# EAGLE board gate (EAGLE 6.1)
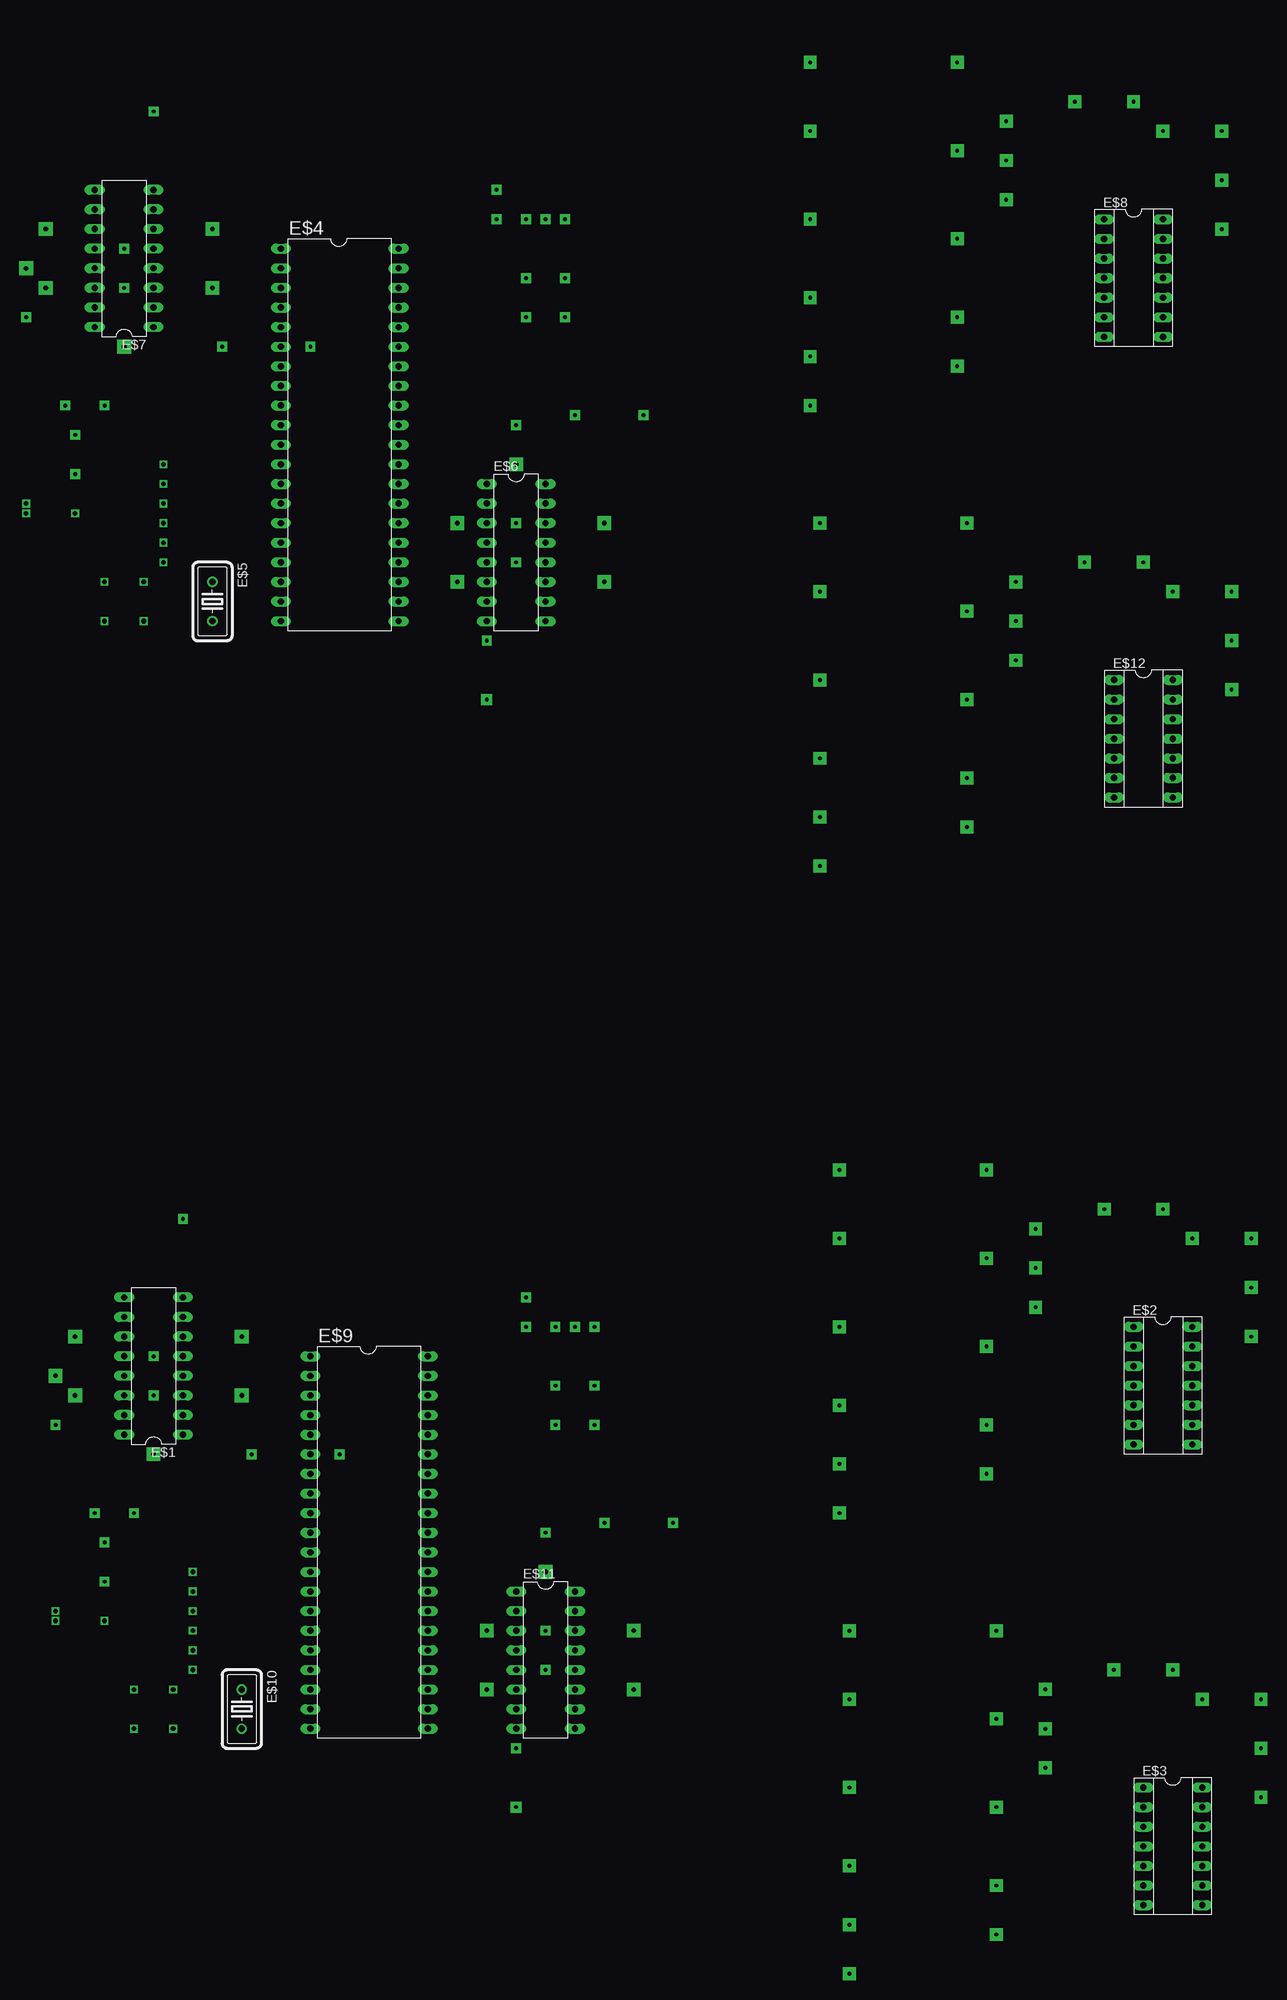
[diagram p0: board, top side]
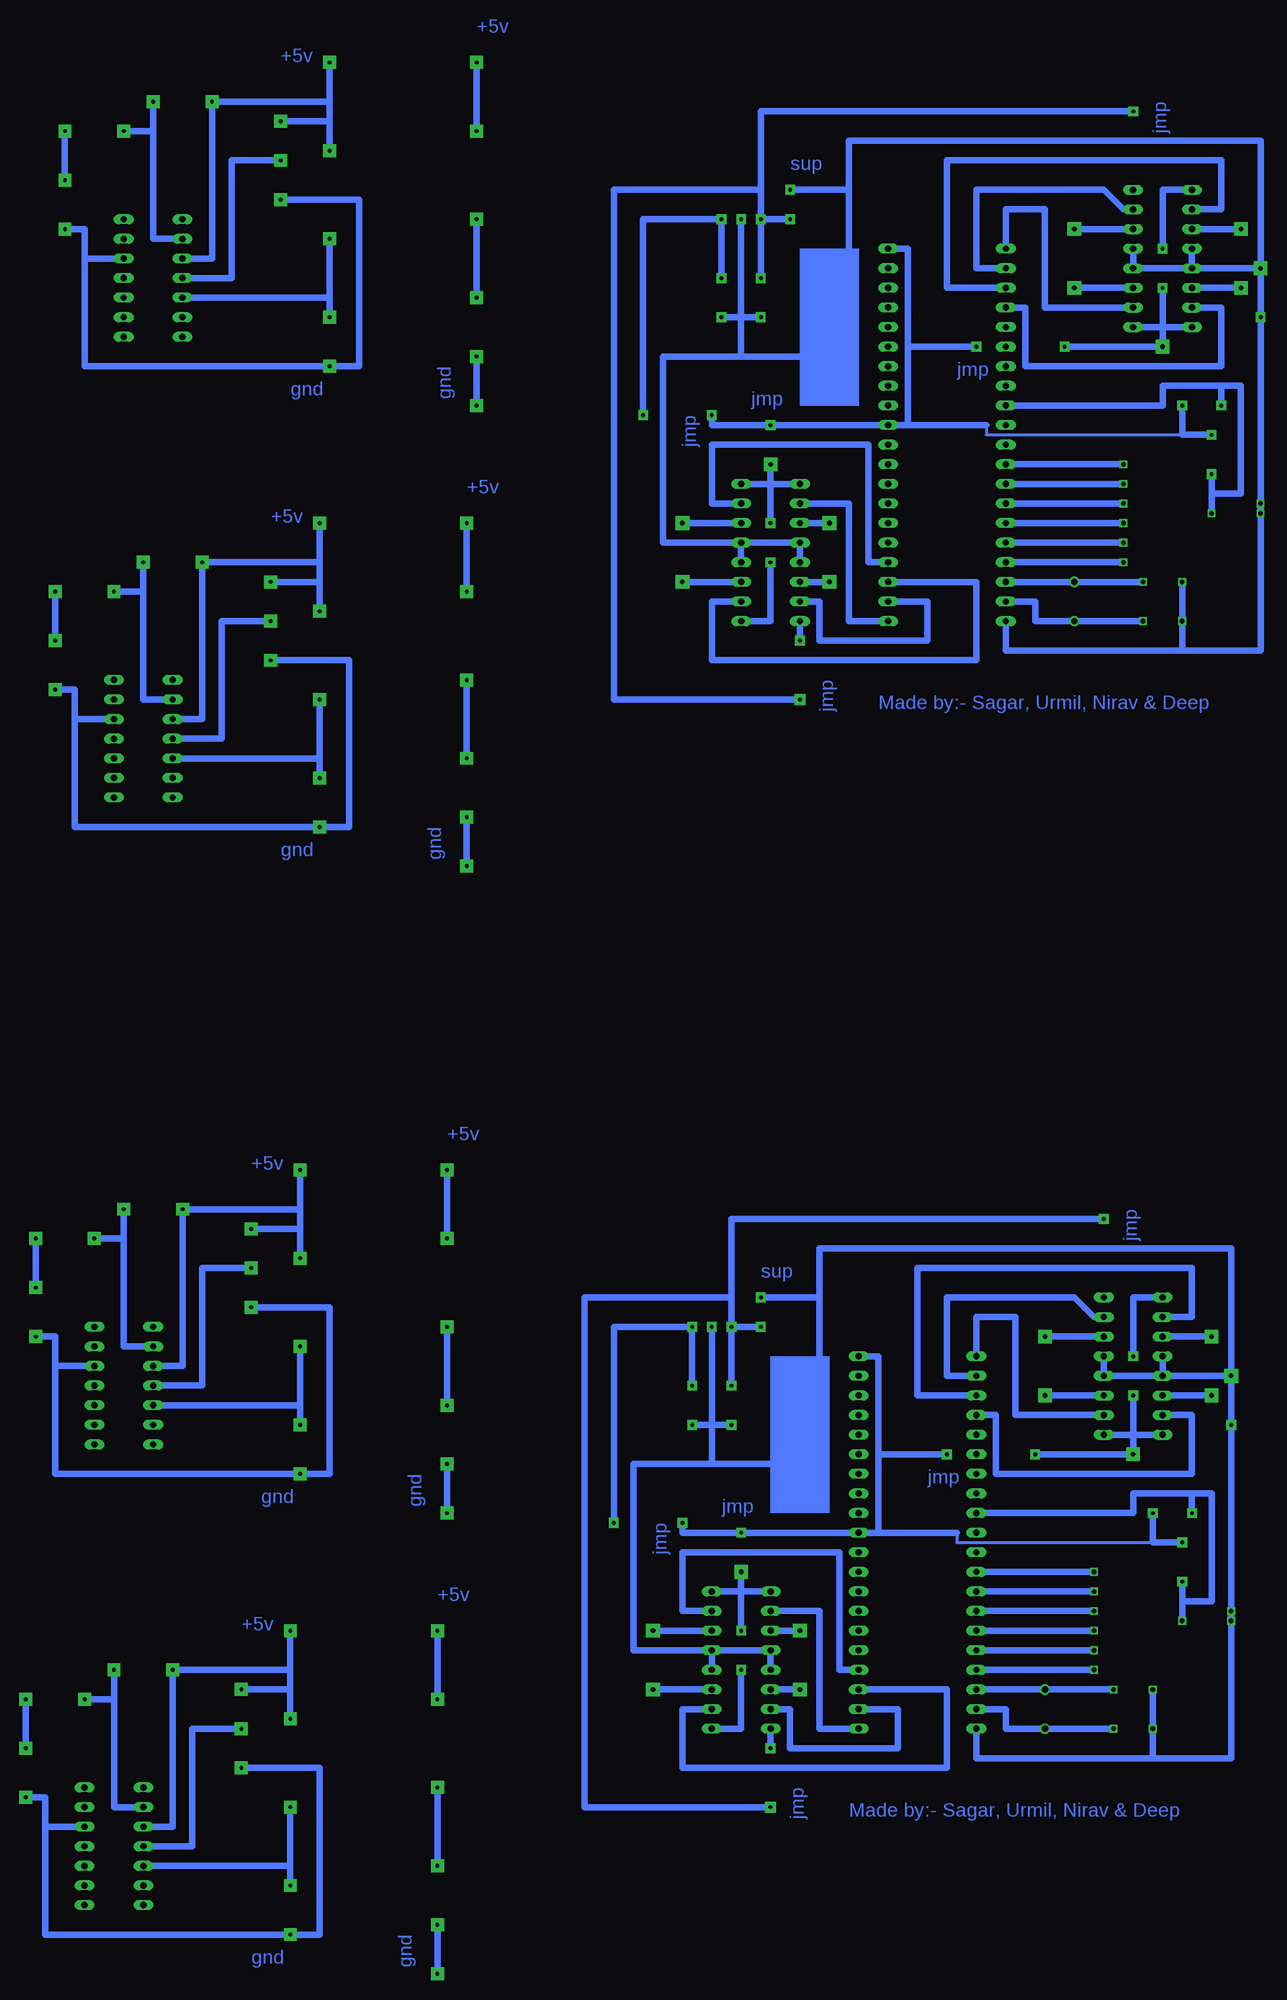
[diagram p1: board, bottom side, seen from below]

No outline drawn. Coordinates in mm, seen from the top.
Copper layers (1*16): Top 0.035mm / dielectric 1.5mm / Bottom 0.035mm
Design rules: minimum track width 10mil, minimum drill 24mil, track to track 8mil, track to pad 8mil, pad to pad 8mil, via to via 8mil, smd to smd 8mil, copper to edge 40mil, drill to drill 8mil, minimum pad ring 10mil, minimum via ring 8mil, stop-mask expansion 4mil, vias tented up to drill 0mil, thermal gap 10mil

## Footprints (pad centres in the part's own frame; a part is rotated, then mirrored left to right if it is on the bottom)
DIL16 = drill 0.813 long: 1 -8.89,-3.81; 2 -6.35,-3.81; 3 -3.81,-3.81; 4 -1.27,-3.81; 5 1.27,-3.81; 6 3.81,-3.81; 7 6.35,-3.81; 8 8.89,-3.81; 9 8.89,3.81; 10 6.35,3.81; 11 3.81,3.81; 12 1.27,3.81; 13 -1.27,3.81; 14 -3.81,3.81; 15 -6.35,3.81; 16 -8.89,3.81
SOCKET-14 = drill 0.813 long: 1 -7.62,-3.81; 2 -5.08,-3.81; 3 -2.54,-3.81; 4 0,-3.81; 5 2.54,-3.81; 6 5.08,-3.81; 7 7.62,-3.81; 8 7.62,3.81; 9 5.08,3.81; 10 2.54,3.81; 11 0,3.81; 12 -2.54,3.81; 13 -5.08,3.81; 14 -7.62,3.81
DIL40 = drill 0.813 long: 1 -24.13,-7.62; 2 -21.59,-7.62; 3 -19.05,-7.62; 4 -16.51,-7.62; 5 -13.97,-7.62; 6 -11.43,-7.62; 7 -8.89,-7.62; 8 -6.35,-7.62; 9 -3.81,-7.62; 10 -1.27,-7.62; 11 1.27,-7.62; 12 3.81,-7.62; 13 6.35,-7.62; 14 8.89,-7.62; 15 11.43,-7.62; 16 13.97,-7.62; 17 16.51,-7.62; 18 19.05,-7.62; 19 21.59,-7.62; 20 24.13,-7.62; 21 24.13,7.62; 22 21.59,7.62; 23 19.05,7.62; 24 16.51,7.62; 25 13.97,7.62; 26 11.43,7.62; 27 8.89,7.62; 28 6.35,7.62; 29 3.81,7.62; 30 1.27,7.62; 31 -1.27,7.62; 32 -3.81,7.62; 33 -6.35,7.62; 34 -8.89,7.62; 35 -11.43,7.62; 36 -13.97,7.62; 37 -16.51,7.62; 38 -19.05,7.62; 39 -21.59,7.62; 40 -24.13,7.62
HC18U-V = drill 0.813: 1 -2.54,0; 2 2.54,0

## Placement (x,y rotation side)
E$1  [DIL16]  -17.78,90.17 90 top
E$2  [SOCKET-14]  113.03,87.63 270 top
E$3  [SOCKET-14]  114.3,27.94 270 top
E$4  [DIL40]  6.35,210.82 270 top
E$5  [HC18U-V]  -10.16,189.23 270 top
E$6  [DIL16]  29.21,195.58 270 top
E$7  [DIL16]  -21.59,233.68 90 top
E$8  [SOCKET-14]  109.22,231.14 270 top
E$9  [DIL40]  10.16,67.31 270 top
E$10  [HC18U-V]  -6.35,45.72 270 top
E$11  [DIL16]  33.02,52.07 270 top
E$12  [SOCKET-14]  110.49,171.45 270 top

## Library data of the parts
E$1 E$4 E$6 E$7 E$9 E$11 = 40xx
E$2 E$3 E$8 E$12 = ic-package
E$5 E$10 = crystal

## Nets
S$1: E$9.18 E$10.1
S$2: E$11.8
S$3: E$1.3
S$5: E$9.31 E$9.40
S$6: E$1.6
S$7: E$11.4 E$11.5 E$11.12 E$11.13
S$8: E$9.19 E$10.2
S$11: E$1.14
S$12: E$9.17
S$13: E$9.16
S$14: E$9.15
S$15: E$9.14
S$16: E$9.13
S$17: E$9.12
S$18: E$9.9
S$21: E$1.11
S$22: E$1.7 E$9.2
S$24: E$1.2 E$9.1
S$25: E$1.10 E$9.3
S$26: E$1.1 E$1.16
S$27: E$1.15 E$9.4
S$29: E$1.9
S$30: E$1.4 E$1.5 E$1.12 E$1.13 E$9.20
S$34: E$2.5
S$35: E$2.4
S$37: E$2.12
S$38: E$2.2
S$41: E$2.3
S$46: E$3.5
S$48: E$3.4
S$49: E$3.12
S$50: E$3.2
S$52: E$3.3
S$53: E$6.3
S$54: E$6.6
S$55: E$11.3
S$56: E$6.14
S$57: E$6.11
S$58: E$4.22 E$6.7
S$59: E$4.21 E$6.2
S$60: E$11.6
S$61: E$4.23 E$6.10
S$62: E$6.1 E$6.16
S$63: E$11.14
S$64: E$4.24 E$6.15
S$65: E$11.11
S$66: E$9.22 E$11.7
S$67: E$9.21 E$11.2
S$68: E$9.23 E$11.10
S$69: E$6.9
S$70: E$11.1 E$11.16
S$71: E$9.24 E$11.15
S$72: E$4.31 E$4.40
S$73: E$11.9
S$74: E$4.9
S$75: E$4.19 E$5.2
S$76: E$4.17
S$77: E$4.16
S$78: E$4.15
S$79: E$4.14
S$80: E$4.13
S$81: E$4.12
S$82: E$4.18 E$5.1
S$85: E$7.3
S$86: E$7.6
S$87: E$7.14
S$88: E$7.11
S$89: E$4.2 E$7.7
S$90: E$4.1 E$7.2
S$91: E$4.3 E$7.10
S$92: E$7.1 E$7.16
S$93: E$4.4 E$7.15
S$94: E$7.9
S$95: E$4.20 E$7.4 E$7.5 E$7.12 E$7.13
S$96: E$6.4 E$6.5 E$6.12 E$6.13
S$99: E$6.8
S$103: E$8.5
S$104: E$8.4
S$105: E$8.12
S$106: E$8.2
S$108: E$8.3
S$112: E$12.5
S$113: E$12.4
S$114: E$12.12
S$115: E$12.2
S$117: E$12.3

## Tracks (layer width: path | path; a pad name or v marks a point on that pad's centre or on a via)
S$1  (via drill 0.6)
  Bottom 0.813: E$9.18 E$10.1 v-15.24,48.26
S$2  (via drill 0.5 pad 1.27)
  Bottom 0.813: E$11.8 v29.21,40.64
S$3  (via drill 0.6 pad 1.78)
  Bottom 0.813: E$1.3 v-6.35,86.36
S$4  (via drill 0.6)
  other vias: -30.48,58.42
S$5  (via drill 0.5 pad 1.27)
  Bottom 0.406: 11.43,68.58 5.08,68.58 5.08,67.31 -20.32,67.31
  Bottom 0.813: E$9.40 15.24,91.44 15.24,78.74 | 15.24,68.58 E$9.31 v33.02,68.58 40.64,68.58 v40.64,69.85 | 15.24,68.58 15.24,78.74 | 15.24,68.58 12.7,68.58 11.43,68.58 5.08,68.58 | v-20.32,71.12 -20.32,67.31 v-24.13,67.31 | v6.35,78.74 15.24,78.74
S$6  (via drill 0.6 pad 1.78)
  Bottom 0.813: E$1.6 v-6.35,93.98
S$7  (via drill 0.5 pad 1.27)
  Bottom 0.813: E$11.13 E$11.12 | E$11.13 E$11.4 E$11.5 | v36.83,95.25 36.83,82.55 | v39.37,82.55 36.83,82.55 | 36.83,82.55 v34.29,82.55 | 36.83,77.47 46.99,77.47 46.99,53.34 E$11.13 | 36.83,77.47 27.94,77.47 | 36.83,82.55 36.83,77.47
S$8  (via drill 0.6)
  Bottom 0.813: E$9.19 -1.27,45.72 -1.27,43.18 E$10.2 v-15.24,43.18
S$9  (via drill 0.5 pad 1.68)
  Bottom 0.813: v71.12,115.57 v71.12,106.68
S$10  (via drill 0.5 pad 1.27, 0.5 pad 1.42)
  Bottom 0.813: v29.21,33.02 53.34,33.02 53.34,99.06 34.29,99.06 | v34.29,95.25 v34.29,87.63 | 34.29,99.06 v34.29,95.25 | 34.29,99.06 34.29,109.22 v-13.97,109.22 | v30.48,95.25 v34.29,95.25
S$11  (via drill 0.6 pad 1.78)
  Bottom 0.813: E$1.14 v-27.94,86.36
S$12  (via drill 0.6)
  Bottom 0.813: E$9.17 v-12.7,50.8
S$13  (via drill 0.6)
  Bottom 0.813: E$9.16 v-12.7,53.34
S$14  (via drill 0.6)
  Bottom 0.813: E$9.15 v-12.7,55.88
S$15  (via drill 0.6)
  Bottom 0.813: E$9.14 v-12.7,58.42
S$16  (via drill 0.6)
  Bottom 0.813: E$9.13 v-12.7,60.96
S$17  (via drill 0.6)
  Bottom 0.813: E$9.12 v-12.7,63.5
S$18  (via drill 0.5 pad 1.27, 0.6)
  Bottom 0.813: v-24.13,62.23 -24.13,59.69 | v-25.4,71.12 -25.4,73.66 | -25.4,73.66 -17.78,73.66 -17.78,71.12 E$9.9 | -25.4,73.66 -27.94,73.66 -27.94,59.69 -24.13,59.69 | -24.13,59.69 v-24.13,57.15
S$19  (via drill 0.6)
  other vias: -20.32,43.18
S$21  (via drill 0.6 pad 1.78)
  Bottom 0.813: E$1.11 v-27.94,93.98
S$22
  Bottom 0.813: E$1.7 -12.7,96.52 -10.16,99.06 6.35,99.06 6.35,88.9 E$9.2
S$24
  Bottom 0.813: E$1.2 -2.54,83.82 -2.54,96.52 2.54,96.52 E$9.1
S$25
  Bottom 0.813: E$1.10 -25.4,96.52 -25.4,102.87 10.16,102.87 10.16,86.36 E$9.3
S$26  (via drill 0.5 pad 1.27, 0.6 pad 1.78)
  Bottom 0.813: E$1.1 -17.78,81.28 | -17.78,81.28 E$1.16 | -17.78,81.28 v-17.78,78.74 v-5.08,78.74 | v-17.78,86.36 -17.78,81.28
S$27
  Bottom 0.813: E$1.15 -25.4,83.82 -25.4,76.2 0,76.2 0,83.82 E$9.4
S$29  (via drill 0.5 pad 0.81, 0.5 pad 1.27)
  Bottom 0.813: E$1.9 -17.78,99.06 v-17.78,91.44
S$30  (via drill 0.5 pad 1.27, 0.6, 0.6 pad 1.78)
  Bottom 0.813: E$1.13 E$1.12 | v-30.48,88.9 E$1.13 | E$1.13 E$1.4 E$1.5 | v-30.48,88.9 -30.48,105.41 22.86,105.41 22.86,99.06 | 22.86,99.06 22.86,88.9 26.67,88.9 26.67,77.47 | v-30.48,88.9 v-30.48,82.55 v-30.48,57.15 -30.48,39.37 -20.32,39.37 | -20.32,39.37 2.54,39.37 E$9.20 | v-20.32,48.26 -20.32,39.37 | 22.86,99.06 v30.48,99.06
S$32  (via drill 0.5 pad 1.68)
  Bottom 0.813: v71.12,95.25 v71.12,85.09
S$33  (via drill 0.5 pad 1.68)
  Bottom 0.813: v71.12,77.47 v71.12,71.12
S$34  (via drill 0.5 pad 1.68)
  Bottom 0.813: v90.17,92.71 90.17,85.09 | 90.17,85.09 v90.17,82.55 | E$2.5 90.17,85.09
S$35  (via drill 0.5 pad 1.68)
  Bottom 0.813: v96.52,102.87 102.87,102.87 102.87,87.63 E$2.4
S$37  (via drill 0.5 pad 1.68)
  Bottom 0.813: E$2.12 121.92,90.17 | 121.92,90.17 121.92,76.2 v90.17,76.2 86.36,76.2 86.36,97.79 v96.52,97.79 | 121.92,90.17 121.92,93.98 v124.46,93.98
S$38  (via drill 0.5 pad 1.68)
  Bottom 0.813: E$2.2 113.03,92.71 113.03,106.68 | v116.84,106.68 114.3,106.68 113.03,106.68 | 113.03,106.68 v113.03,110.49
S$40  (via drill 0.5 pad 1.68)
  Bottom 0.813: v124.46,106.68 v124.46,100.33
S$41  (via drill 0.5 pad 1.68)
  Bottom 0.813: v90.17,115.57 90.17,110.49 | 90.17,110.49 90.17,107.95 | v96.52,107.95 90.17,107.95 | 90.17,107.95 v90.17,104.14 | E$2.3 105.41,90.17 v105.41,110.49 90.17,110.49
S$42  (via drill 0.5 pad 1.68)
  Bottom 0.813: v72.39,55.88 v72.39,46.99
S$43  (via drill 0.5 pad 1.68)
  Bottom 0.813: v72.39,35.56 v72.39,25.4
S$45  (via drill 0.5 pad 1.68)
  Bottom 0.813: v72.39,17.78 v72.39,11.43
S$46  (via drill 0.5 pad 1.68)
  Bottom 0.813: v91.44,33.02 91.44,25.4 | 91.44,25.4 v91.44,22.86 | E$3.5 91.44,25.4
S$48  (via drill 0.5 pad 1.68)
  Bottom 0.813: v97.79,43.18 104.14,43.18 104.14,27.94 E$3.4
S$49  (via drill 0.5 pad 1.68)
  Bottom 0.813: E$3.12 123.19,30.48 | 123.19,30.48 123.19,16.51 v91.44,16.51 87.63,16.51 87.63,38.1 v97.79,38.1 | 123.19,30.48 123.19,34.29 v125.73,34.29
S$50  (via drill 0.5 pad 1.68)
  Bottom 0.813: E$3.2 114.3,33.02 114.3,46.99 | v118.11,46.99 115.57,46.99 114.3,46.99 | 114.3,46.99 v114.3,50.8
S$51  (via drill 0.5 pad 1.68)
  Bottom 0.813: v125.73,46.99 v125.73,40.64
S$52  (via drill 0.5 pad 1.68)
  Bottom 0.813: v91.44,55.88 91.44,50.8 | 91.44,50.8 91.44,48.26 | v97.79,48.26 91.44,48.26 | 91.44,48.26 v91.44,44.45 | E$3.3 106.68,30.48 v106.68,50.8 91.44,50.8
S$53  (via drill 0.6 pad 1.78)
  Bottom 0.813: E$6.3 v21.59,199.39
S$54  (via drill 0.6 pad 1.78)
  Bottom 0.813: E$6.6 v21.59,191.77
S$55  (via drill 0.6 pad 1.78)
  Bottom 0.813: E$11.3 v25.4,55.88
S$56  (via drill 0.6 pad 1.78)
  Bottom 0.813: E$6.14 v40.64,199.39
S$57  (via drill 0.6 pad 1.78)
  Bottom 0.813: E$6.11 v40.64,191.77
S$58
  Bottom 0.813: E$6.7 22.86,189.23 22.86,184.15 8.89,184.15 8.89,189.23 E$4.22
S$59
  Bottom 0.813: E$6.2 19.05,201.93 19.05,186.69 E$4.21
S$60  (via drill 0.6 pad 1.78)
  Bottom 0.813: E$11.6 v25.4,48.26
S$61
  Bottom 0.813: E$4.23 2.54,191.77 2.54,181.61 36.83,181.61 36.83,189.23 E$6.10
S$62  (via drill 0.5 pad 1.27, 0.6 pad 1.78)
  Bottom 0.813: E$6.1 29.21,204.47 | 29.21,204.47 E$6.16 | 29.21,204.47 v29.21,207.01 | v29.21,199.39 29.21,204.47
S$63  (via drill 0.6 pad 1.78)
  Bottom 0.813: E$11.14 v44.45,55.88
S$64
  Bottom 0.813: E$4.24 16.51,194.31 16.51,209.55 36.83,209.55 36.83,201.93 E$6.15
S$65  (via drill 0.6 pad 1.78)
  Bottom 0.813: E$11.11 v44.45,48.26
S$66
  Bottom 0.813: E$11.7 26.67,45.72 26.67,40.64 12.7,40.64 12.7,45.72 E$9.22
S$67
  Bottom 0.813: E$11.2 22.86,58.42 22.86,43.18 E$9.21
S$68
  Bottom 0.813: E$9.23 6.35,48.26 6.35,38.1 40.64,38.1 40.64,45.72 E$11.10
S$69  (via drill 0.5 pad 0.81, 0.5 pad 1.27)
  Bottom 0.813: E$6.9 29.21,186.69 v29.21,194.31
S$70  (via drill 0.5 pad 1.27, 0.6 pad 1.78)
  Bottom 0.813: E$11.1 33.02,60.96 | 33.02,60.96 E$11.16 | 33.02,60.96 v33.02,63.5 | v33.02,55.88 33.02,60.96
S$71
  Bottom 0.813: E$9.24 20.32,50.8 20.32,66.04 40.64,66.04 40.64,58.42 E$11.15
S$72  (via drill 0.5 pad 1.27)
  Bottom 0.406: 7.62,212.09 1.27,212.09 1.27,210.82 -24.13,210.82
  Bottom 0.813: E$4.40 11.43,234.95 11.43,222.25 | 11.43,212.09 E$4.31 v29.21,212.09 36.83,212.09 v36.83,213.36 | 11.43,212.09 11.43,222.25 | 11.43,212.09 8.89,212.09 7.62,212.09 1.27,212.09 | v-24.13,214.63 -24.13,210.82 v-27.94,210.82 | v2.54,222.25 11.43,222.25
S$73  (via drill 0.5 pad 0.81, 0.5 pad 1.27)
  Bottom 0.813: E$11.9 33.02,43.18 v33.02,50.8
S$74  (via drill 0.5 pad 1.27, 0.6)
  Bottom 0.813: v-27.94,205.74 -27.94,203.2 | v-29.21,214.63 -29.21,217.17 | -29.21,217.17 -21.59,217.17 -21.59,214.63 E$4.9 | -29.21,217.17 -31.75,217.17 -31.75,203.2 -27.94,203.2 | -27.94,203.2 v-27.94,200.66
S$75  (via drill 0.6)
  Bottom 0.813: E$4.19 -5.08,189.23 -5.08,186.69 E$5.2 v-19.05,186.69
S$76  (via drill 0.6)
  Bottom 0.813: E$4.17 v-16.51,194.31
S$77  (via drill 0.6)
  Bottom 0.813: E$4.16 v-16.51,196.85
S$78  (via drill 0.6)
  Bottom 0.813: E$4.15 v-16.51,199.39
S$79  (via drill 0.6)
  Bottom 0.813: E$4.14 v-16.51,201.93
S$80  (via drill 0.6)
  Bottom 0.813: E$4.13 v-16.51,204.47
S$81  (via drill 0.6)
  Bottom 0.813: E$4.12 v-16.51,207.01
S$82  (via drill 0.6)
  Bottom 0.813: E$4.18 E$5.1 v-19.05,191.77
S$83  (via drill 0.6)
  other vias: -34.29,201.93
S$84  (via drill 0.6)
  other vias: -24.13,186.69
S$85  (via drill 0.6 pad 1.78)
  Bottom 0.813: E$7.3 v-10.16,229.87
S$86  (via drill 0.6 pad 1.78)
  Bottom 0.813: E$7.6 v-10.16,237.49
S$87  (via drill 0.6 pad 1.78)
  Bottom 0.813: E$7.14 v-31.75,229.87
S$88  (via drill 0.6 pad 1.78)
  Bottom 0.813: E$7.11 v-31.75,237.49
S$89
  Bottom 0.813: E$7.7 -16.51,240.03 -13.97,242.57 2.54,242.57 2.54,232.41 E$4.2
S$90
  Bottom 0.813: E$7.2 -6.35,227.33 -6.35,240.03 -1.27,240.03 E$4.1
S$91
  Bottom 0.813: E$7.10 -29.21,240.03 -29.21,246.38 6.35,246.38 6.35,229.87 E$4.3
S$92  (via drill 0.5 pad 1.27, 0.6 pad 1.78)
  Bottom 0.813: E$7.1 -21.59,224.79 | -21.59,224.79 E$7.16 | -21.59,224.79 v-21.59,222.25 v-8.89,222.25 | v-21.59,229.87 -21.59,224.79
S$93
  Bottom 0.813: E$7.15 -29.21,227.33 -29.21,219.71 -3.81,219.71 -3.81,227.33 E$4.4
S$94  (via drill 0.5 pad 0.81, 0.5 pad 1.27)
  Bottom 0.813: E$7.9 -21.59,242.57 v-21.59,234.95
S$95  (via drill 0.5 pad 1.27, 0.6, 0.6 pad 1.78)
  Bottom 0.813: E$7.13 E$7.12 | v-34.29,232.41 E$7.13 | E$7.13 E$7.4 E$7.5 | v-34.29,232.41 -34.29,248.92 19.05,248.92 19.05,242.57 | 19.05,242.57 19.05,232.41 22.86,232.41 22.86,220.98 | v-34.29,232.41 v-34.29,226.06 v-34.29,200.66 -34.29,182.88 -24.13,182.88 | -24.13,182.88 -1.27,182.88 E$4.20 | v-24.13,191.77 -24.13,182.88 | 19.05,242.57 v26.67,242.57
S$96  (via drill 0.5 pad 1.27)
  Bottom 0.813: E$6.13 E$6.12 | E$6.13 E$6.4 E$6.5 | v33.02,238.76 33.02,226.06 | v35.56,226.06 33.02,226.06 | 33.02,226.06 v30.48,226.06 | 33.02,220.98 43.18,220.98 43.18,196.85 E$6.13 | 33.02,220.98 24.13,220.98 | 33.02,226.06 33.02,220.98
S$97  (via drill 0.5 pad 1.27)
  Bottom 0.813: v35.56,231.14 v35.56,238.76 45.72,238.76 v45.72,213.36
S$98  (via drill 0.5 pad 1.27, 0.5 pad 1.42)
  Bottom 0.813: v25.4,176.53 49.53,176.53 49.53,242.57 30.48,242.57 | v30.48,238.76 v30.48,231.14 | 30.48,242.57 v30.48,238.76 | 30.48,242.57 30.48,252.73 v-17.78,252.73 | v26.67,238.76 v30.48,238.76
S$99  (via drill 0.5 pad 1.27)
  Bottom 0.813: E$6.8 v25.4,184.15
S$100  (via drill 0.5 pad 1.68)
  Bottom 0.813: v67.31,259.08 v67.31,250.19
S$101  (via drill 0.5 pad 1.68)
  Bottom 0.813: v67.31,238.76 v67.31,228.6
S$102  (via drill 0.5 pad 1.68)
  Bottom 0.813: v67.31,220.98 v67.31,214.63
S$103  (via drill 0.5 pad 1.68)
  Bottom 0.813: v86.36,236.22 86.36,228.6 | 86.36,228.6 v86.36,226.06 | E$8.5 86.36,228.6
S$104  (via drill 0.5 pad 1.68)
  Bottom 0.813: v92.71,246.38 99.06,246.38 99.06,231.14 E$8.4
S$105  (via drill 0.5 pad 1.68)
  Bottom 0.813: E$8.12 118.11,233.68 | 118.11,233.68 118.11,219.71 v86.36,219.71 82.55,219.71 82.55,241.3 v92.71,241.3 | 118.11,233.68 118.11,237.49 v120.65,237.49
S$106  (via drill 0.5 pad 1.68)
  Bottom 0.813: E$8.2 109.22,236.22 109.22,250.19 | v113.03,250.19 110.49,250.19 109.22,250.19 | 109.22,250.19 v109.22,254
S$107  (via drill 0.5 pad 1.68)
  Bottom 0.813: v120.65,250.19 v120.65,243.84
S$108  (via drill 0.5 pad 1.68)
  Bottom 0.813: v86.36,259.08 86.36,254 | 86.36,254 86.36,251.46 | v92.71,251.46 86.36,251.46 | 86.36,251.46 v86.36,247.65 | E$8.3 101.6,233.68 v101.6,254 86.36,254
S$109  (via drill 0.5 pad 1.68)
  Bottom 0.813: v68.58,199.39 v68.58,190.5
S$110  (via drill 0.5 pad 1.68)
  Bottom 0.813: v68.58,179.07 v68.58,168.91
S$111  (via drill 0.5 pad 1.68)
  Bottom 0.813: v68.58,161.29 v68.58,154.94
S$112  (via drill 0.5 pad 1.68)
  Bottom 0.813: v87.63,176.53 87.63,168.91 | 87.63,168.91 v87.63,166.37 | E$12.5 87.63,168.91
S$113  (via drill 0.5 pad 1.68)
  Bottom 0.813: v93.98,186.69 100.33,186.69 100.33,171.45 E$12.4
S$114  (via drill 0.5 pad 1.68)
  Bottom 0.813: E$12.12 119.38,173.99 | 119.38,173.99 119.38,160.02 v87.63,160.02 83.82,160.02 83.82,181.61 v93.98,181.61 | 119.38,173.99 119.38,177.8 v121.92,177.8
S$115  (via drill 0.5 pad 1.68)
  Bottom 0.813: E$12.2 110.49,176.53 110.49,190.5 | v114.3,190.5 111.76,190.5 110.49,190.5 | 110.49,190.5 v110.49,194.31
S$116  (via drill 0.5 pad 1.68)
  Bottom 0.813: v121.92,190.5 v121.92,184.15
S$117  (via drill 0.5 pad 1.68)
  Bottom 0.813: v87.63,199.39 87.63,194.31 | 87.63,194.31 87.63,191.77 | v93.98,191.77 87.63,191.77 | 87.63,191.77 v87.63,187.96 | E$12.3 102.87,173.99 v102.87,194.31 87.63,194.31
S$148  (via drill 0.5 pad 1.27)
  Bottom 0.813: v39.37,87.63 v39.37,95.25 49.53,95.25 v49.53,69.85
(copper drawn outside any net)
  shapes: Bottom area x2

## Text on the board
Bottom: +5v | +5v | jmp | sup | gnd | jmp | gnd | jmp | jmp | +5v | +5v | jmp | Made by:- Sagar, Urmil, Nirav & Deep | gnd | gnd | +5v | +5v | jmp | sup | gnd | jmp | gnd | jmp | jmp | +5v | +5v | jmp | Made by:- Sagar, Urmil, Nirav & Deep | gnd | gnd